# EAGLE board SpannungsverdopplerMit3LED (EAGLE 6.5.0)
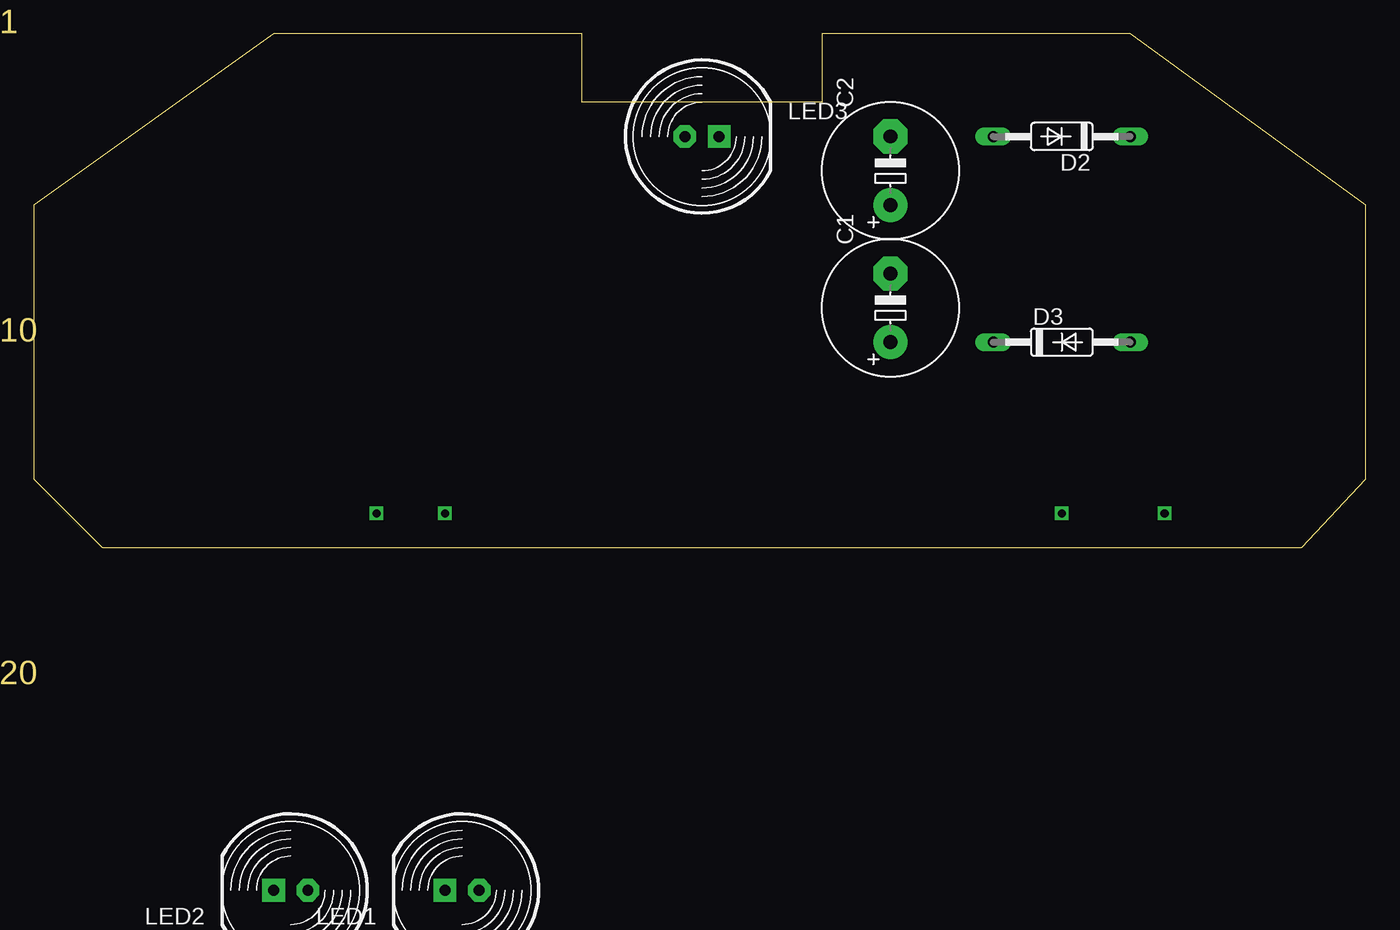
[diagram p0: board, top side]
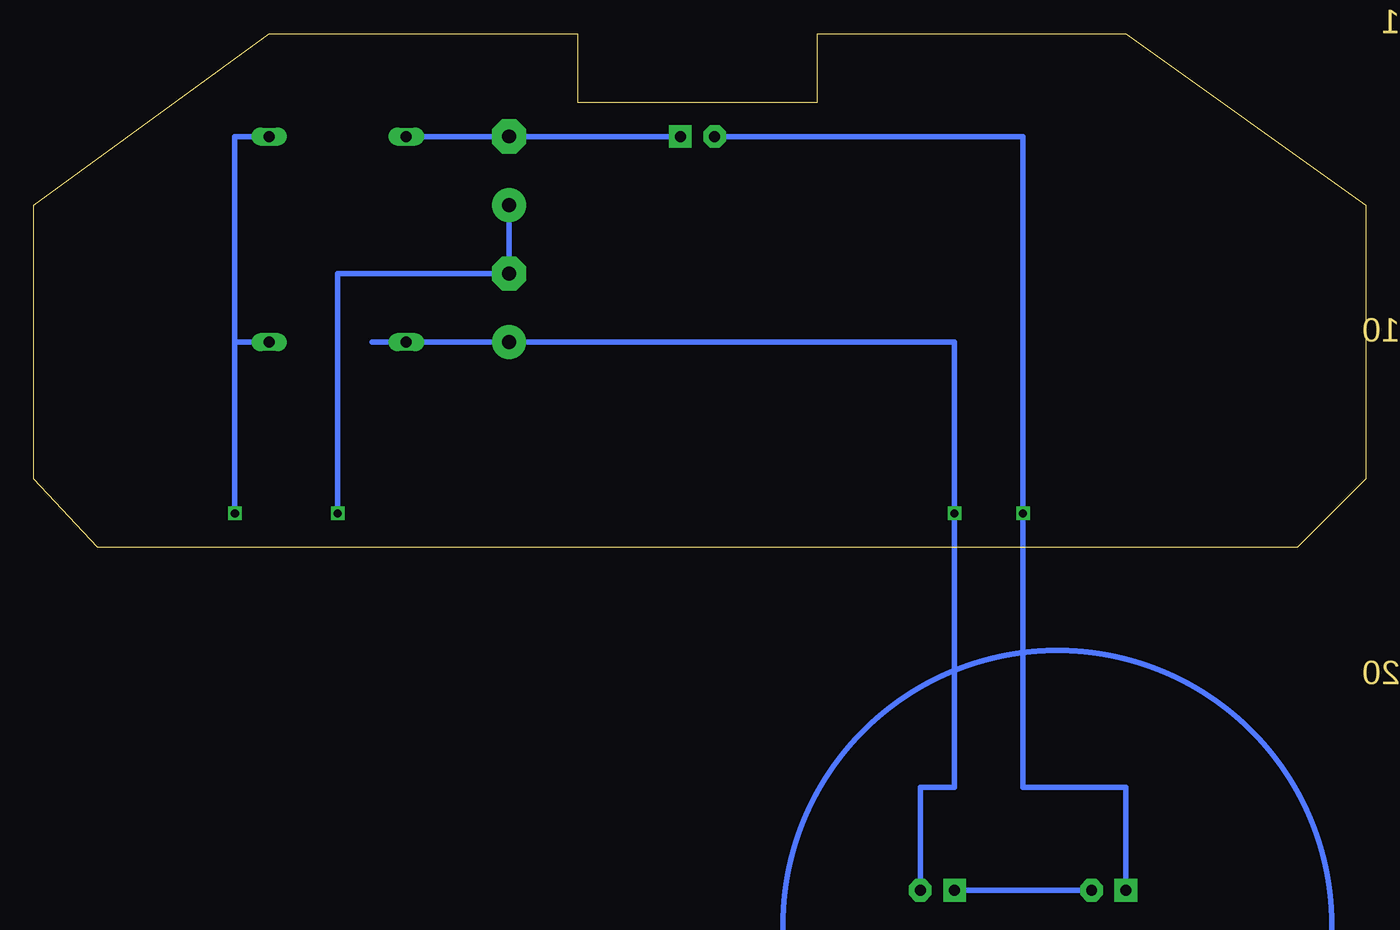
[diagram p1: board, bottom side, seen from below]

Size 98.73 x 38.1 mm. Coordinates in mm from the lower left corner, seen from the top.
Outline: 5.08,0 93.98,0 98.73,5.08 98.73,25.39 81.28,38.09 81.28,38.1 58.42,38.1 58.42,33.02 40.64,33.02 40.64,38.1 17.78,38.1 17.78,38.09 0,25.39 0,5.08 5.08,0
Copper layers (1*16): Top 0.035mm / dielectric 1.5mm / Bottom 0.035mm
Design rules "default": minimum track width 10mil, minimum drill 24mil, track to track 8mil, track to pad 8mil, pad to pad 8mil, via to via 8mil, smd to smd 8mil, copper to edge 40mil, drill to drill 8mil, minimum pad ring 10mil, minimum via ring 8mil, stop-mask expansion 4mil, vias tented up to drill 0mil, thermal gap 10mil

## Footprints (pad centres in the part's own frame; a part is rotated, then mirrored left to right if it is on the bottom)
E5-10,5 = drill 1.016 pad 2.54: + -2.54,0 | drill 1.016 pad 2.54 octagon: - 2.54,0
DO35-10 = drill 0.813 long: A 5.08,0; C -5.08,0
LED10MM = drill 0.813 pad 1.676 octagon: A -1.27,0 | drill 0.813 pad 1.676 square: K 1.27,0

## Placement (x,y rotation side)
C1  2200 µF  [E5-10,5]  63.5,17.78 90 top
C2  2200 µF  [E5-10,5]  63.5,27.94 90 top
D2  1N4148  [DO35-10]  76.2,30.48 180 top
D3  1N4148  [DO35-10]  76.2,15.24 0 top
LED1  [LED10MM]  31.75,-25.4 180 top  (outside the outline)
LED2  [LED10MM]  19.05,-25.4 180 top  (outside the outline)
LED3  [LED10MM]  49.53,30.48 0 top

## Library data of the parts
C1 C2 = rcl
D2 D3 = diode
LED1-LED3 = led

## Nets
D1: D2.C D3.A
D2: C1.- C2.+
LV1: LED1.K LED2.A
LV2: C2.- D2.A LED3.K
N$1: C1.+ D3.C LED1.A
N$11: LED2.K LED3.A

## Tracks (layer width: path | path; a pad name or v marks a point on that pad's centre or on a via)
D1  (via drill 0.6)
  Bottom 0.406: D2.C 83.82,30.48 83.82,15.24 | 83.82,15.24 D3.A | 83.82,15.24 v83.82,2.54
D2  (via drill 0.6)
  Bottom 0.406: C2.+ C1.- 76.2,20.32 v76.2,2.54
LV1
  Bottom 0.406: LED2.A LED1.K
LV2
  Bottom 0.406: D2.A C2.- LED3.K
N$1  (via drill 0.6)
  Bottom 0.406: 73.66,15.24 D3.C C1.+ 30.48,15.24 v30.48,2.54 30.48,-17.78 33.02,-17.78 LED1.A
N$11
  Bottom 0.406: LED3.A 25.4,30.48 25.4,-17.78 17.78,-17.78 LED2.K
N$13  (via drill 0.6)
  other vias: 25.4,2.54
(copper drawn outside any net)
  shapes: Bottom circle x1

## Text on the board
Dimension: 1 | 10 | 20 | 30 | 39 | 1 | 10 | 20